# EAGLE board PCR-Voltage-Divider-Storage-Unit-array (EAGLE 7.7.0)
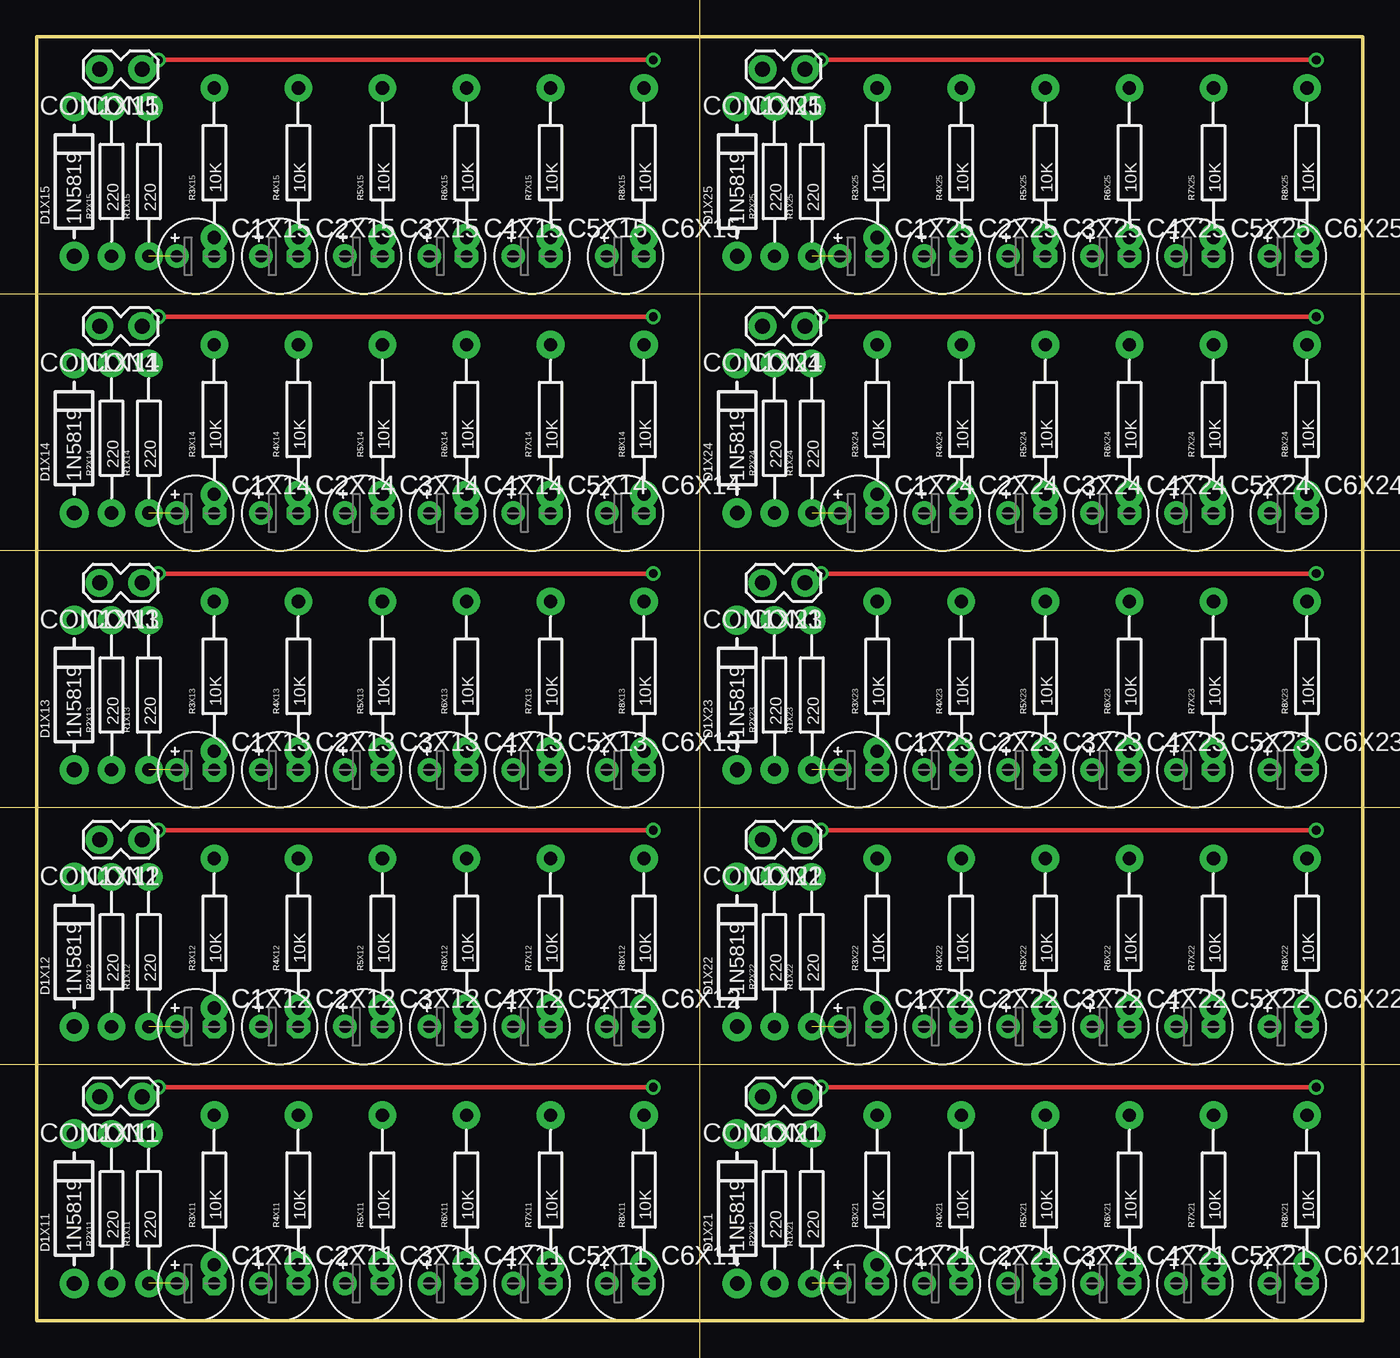
[diagram p0: board, top side]
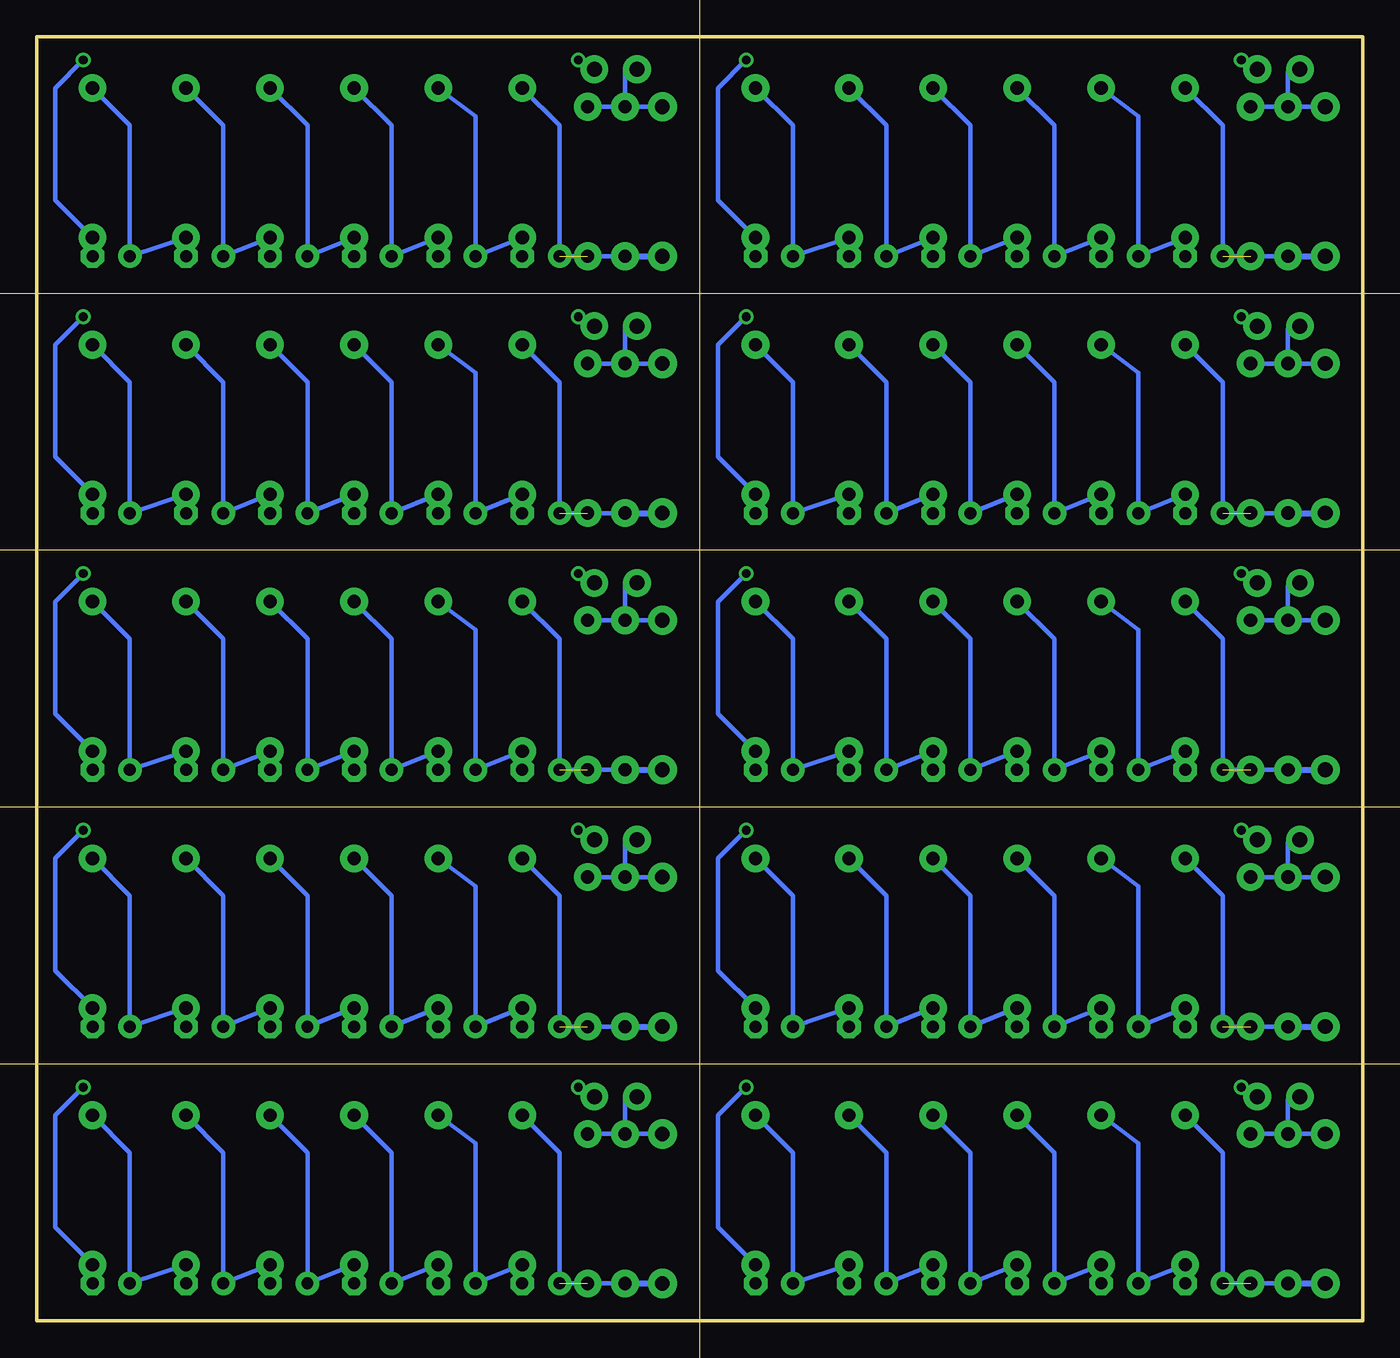
[diagram p1: board, bottom side, seen from below]

Size 90.13 x 87.25 mm. Coordinates in mm from the lower left corner, seen from the top.
Outline: 0,0 90.13,0 90.13,87.25 0,87.25 0,0
Copper layers (1*16): Top 0.035mm / dielectric 1.5mm / Bottom 0.035mm
Design rules "default": minimum track width 10mil, minimum drill 24mil, track to track 8mil, track to pad 8mil, pad to pad 8mil, via to via 8mil, smd to smd 8mil, copper to edge 40mil, drill to drill 8mil, minimum pad ring 10mil, minimum via ring 8mil, stop-mask expansion 4mil, vias tented up to drill 0mil, thermal gap 10mil
Milling: 5 lines

## Footprints (pad centres in the part's own frame; a part is rotated, then mirrored left to right if it is on the bottom)
E2,5-5 = drill 0.813 pad 1.6: + -1.27,0 | drill 0.813 pad 1.6 octagon: - 1.27,0
1X02_LOCK = drill 1.016 pad 1.88: 1 -0.178,0; 2 2.718,0
DIODE-1N4001 = drill 1 pad 1.981: A 5.08,0; C -5.08,0
AXIAL-0.4-RES = drill 0.9 pad 1.88: P$1 -5.08,0; P$2 5.08,0

## Placement (x,y rotation side)
C1X11  .22F  [E2,5-5]  10.79,2.54 0 top
C1X12  .22F  [E2,5-5]  10.79,19.99 0 top
C1X13  .22F  [E2,5-5]  10.79,37.44 0 top
C1X14  .22F  [E2,5-5]  10.79,54.89 0 top
C1X15  .22F  [E2,5-5]  10.79,72.34 0 top
C1X21  .22F  [E2,5-5]  55.86,2.54 0 top
C1X22  .22F  [E2,5-5]  55.86,19.99 0 top
C1X23  .22F  [E2,5-5]  55.86,37.44 0 top
C1X24  .22F  [E2,5-5]  55.86,54.89 0 top
C1X25  .22F  [E2,5-5]  55.86,72.34 0 top
C2X11  .22F  [E2,5-5]  16.51,2.54 0 top
C2X12  .22F  [E2,5-5]  16.51,19.99 0 top
C2X13  .22F  [E2,5-5]  16.51,37.44 0 top
C2X14  .22F  [E2,5-5]  16.51,54.89 0 top
C2X15  .22F  [E2,5-5]  16.51,72.34 0 top
C2X21  .22F  [E2,5-5]  61.58,2.54 0 top
C2X22  .22F  [E2,5-5]  61.58,19.99 0 top
C2X23  .22F  [E2,5-5]  61.58,37.44 0 top
C2X24  .22F  [E2,5-5]  61.58,54.89 0 top
C2X25  .22F  [E2,5-5]  61.58,72.34 0 top
C3X11  .22F  [E2,5-5]  22.23,2.54 0 top
C3X12  .22F  [E2,5-5]  22.23,19.99 0 top
C3X13  .22F  [E2,5-5]  22.23,37.44 0 top
C3X14  .22F  [E2,5-5]  22.23,54.89 0 top
C3X15  .22F  [E2,5-5]  22.23,72.34 0 top
C3X21  .22F  [E2,5-5]  67.29,2.54 0 top
C3X22  .22F  [E2,5-5]  67.29,19.99 0 top
C3X23  .22F  [E2,5-5]  67.29,37.44 0 top
C3X24  .22F  [E2,5-5]  67.29,54.89 0 top
C3X25  .22F  [E2,5-5]  67.29,72.34 0 top
C4X11  .22F  [E2,5-5]  27.94,2.54 0 top
C4X12  .22F  [E2,5-5]  27.94,19.99 0 top
C4X13  .22F  [E2,5-5]  27.94,37.44 0 top
C4X14  .22F  [E2,5-5]  27.94,54.89 0 top
C4X15  .22F  [E2,5-5]  27.94,72.34 0 top
C4X21  .22F  [E2,5-5]  73,2.54 0 top
C4X22  .22F  [E2,5-5]  73,19.99 0 top
C4X23  .22F  [E2,5-5]  73,37.44 0 top
C4X24  .22F  [E2,5-5]  73,54.89 0 top
C4X25  .22F  [E2,5-5]  73,72.34 0 top
C5X11  .22F @ 2.5V  [E2,5-5]  33.66,2.54 0 top
C5X12  .22F @ 2.5V  [E2,5-5]  33.66,19.99 0 top
C5X13  .22F @ 2.5V  [E2,5-5]  33.66,37.44 0 top
C5X14  .22F @ 2.5V  [E2,5-5]  33.66,54.89 0 top
C5X15  .22F @ 2.5V  [E2,5-5]  33.66,72.34 0 top
C5X21  .22F @ 2.5V  [E2,5-5]  78.72,2.54 0 top
C5X22  .22F @ 2.5V  [E2,5-5]  78.72,19.99 0 top
C5X23  .22F @ 2.5V  [E2,5-5]  78.72,37.44 0 top
C5X24  .22F @ 2.5V  [E2,5-5]  78.72,54.89 0 top
C5X25  .22F @ 2.5V  [E2,5-5]  78.72,72.34 0 top
C6X11  .22F  [E2,5-5]  40.01,2.54 0 top
C6X12  .22F  [E2,5-5]  40.01,19.99 0 top
C6X13  .22F  [E2,5-5]  40.01,37.44 0 top
C6X14  .22F  [E2,5-5]  40.01,54.89 0 top
C6X15  .22F  [E2,5-5]  40.01,72.34 0 top
C6X21  .22F  [E2,5-5]  85.07,2.54 0 top
C6X22  .22F  [E2,5-5]  85.07,19.99 0 top
C6X23  .22F  [E2,5-5]  85.07,37.44 0 top
C6X24  .22F  [E2,5-5]  85.07,54.89 0 top
C6X25  .22F  [E2,5-5]  85.07,72.34 0 top
CON1X11  [1X02_LOCK]  6.99,15.24 180 top
CON1X12  [1X02_LOCK]  6.99,32.69 180 top
CON1X13  [1X02_LOCK]  6.99,50.14 180 top
CON1X14  [1X02_LOCK]  6.99,67.59 180 top
CON1X15  [1X02_LOCK]  6.99,85.04 180 top
CON1X21  [1X02_LOCK]  52.05,15.24 180 top
CON1X22  [1X02_LOCK]  52.05,32.69 180 top
CON1X23  [1X02_LOCK]  52.05,50.14 180 top
CON1X24  [1X02_LOCK]  52.05,67.59 180 top
CON1X25  [1X02_LOCK]  52.05,85.04 180 top
D1X11  1N5819  [DIODE-1N4001]  2.54,7.62 270 top
D1X12  1N5819  [DIODE-1N4001]  2.54,25.07 270 top
D1X13  1N5819  [DIODE-1N4001]  2.54,42.52 270 top
D1X14  1N5819  [DIODE-1N4001]  2.54,59.97 270 top
D1X15  1N5819  [DIODE-1N4001]  2.54,77.42 270 top
D1X21  1N5819  [DIODE-1N4001]  47.6,7.62 270 top
D1X22  1N5819  [DIODE-1N4001]  47.6,25.07 270 top
D1X23  1N5819  [DIODE-1N4001]  47.6,42.52 270 top
D1X24  1N5819  [DIODE-1N4001]  47.6,59.97 270 top
D1X25  1N5819  [DIODE-1N4001]  47.6,77.42 270 top
R1X11  220  [AXIAL-0.4-RES]  7.62,7.62 90 top
R1X12  220  [AXIAL-0.4-RES]  7.62,25.07 90 top
R1X13  220  [AXIAL-0.4-RES]  7.62,42.52 90 top
R1X14  220  [AXIAL-0.4-RES]  7.62,59.97 90 top
R1X15  220  [AXIAL-0.4-RES]  7.62,77.42 90 top
R1X21  220  [AXIAL-0.4-RES]  52.69,7.62 90 top
R1X22  220  [AXIAL-0.4-RES]  52.69,25.07 90 top
R1X23  220  [AXIAL-0.4-RES]  52.69,42.52 90 top
R1X24  220  [AXIAL-0.4-RES]  52.69,59.97 90 top
R1X25  220  [AXIAL-0.4-RES]  52.69,77.42 90 top
R2X11  220  [AXIAL-0.4-RES]  5.08,7.62 90 top
R2X12  220  [AXIAL-0.4-RES]  5.08,25.07 90 top
R2X13  220  [AXIAL-0.4-RES]  5.08,42.52 90 top
R2X14  220  [AXIAL-0.4-RES]  5.08,59.97 90 top
R2X15  220  [AXIAL-0.4-RES]  5.08,77.42 90 top
R2X21  220  [AXIAL-0.4-RES]  50.15,7.62 90 top
R2X22  220  [AXIAL-0.4-RES]  50.15,25.07 90 top
R2X23  220  [AXIAL-0.4-RES]  50.15,42.52 90 top
R2X24  220  [AXIAL-0.4-RES]  50.15,59.97 90 top
R2X25  220  [AXIAL-0.4-RES]  50.15,77.42 90 top
R3X11  10K  [AXIAL-0.4-RES]  12.06,8.89 90 top
R3X12  10K  [AXIAL-0.4-RES]  12.06,26.34 90 top
R3X13  10K  [AXIAL-0.4-RES]  12.06,43.79 90 top
R3X14  10K  [AXIAL-0.4-RES]  12.06,61.24 90 top
R3X15  10K  [AXIAL-0.4-RES]  12.06,78.69 90 top
R3X21  10K  [AXIAL-0.4-RES]  57.13,8.89 90 top
R3X22  10K  [AXIAL-0.4-RES]  57.13,26.34 90 top
R3X23  10K  [AXIAL-0.4-RES]  57.13,43.79 90 top
R3X24  10K  [AXIAL-0.4-RES]  57.13,61.24 90 top
R3X25  10K  [AXIAL-0.4-RES]  57.13,78.69 90 top
R4X11  10K  [AXIAL-0.4-RES]  17.78,8.89 90 top
R4X12  10K  [AXIAL-0.4-RES]  17.78,26.34 90 top
R4X13  10K  [AXIAL-0.4-RES]  17.78,43.79 90 top
R4X14  10K  [AXIAL-0.4-RES]  17.78,61.24 90 top
R4X15  10K  [AXIAL-0.4-RES]  17.78,78.69 90 top
R4X21  10K  [AXIAL-0.4-RES]  62.84,8.89 90 top
R4X22  10K  [AXIAL-0.4-RES]  62.84,26.34 90 top
R4X23  10K  [AXIAL-0.4-RES]  62.84,43.79 90 top
R4X24  10K  [AXIAL-0.4-RES]  62.84,61.24 90 top
R4X25  10K  [AXIAL-0.4-RES]  62.84,78.69 90 top
R5X11  10K  [AXIAL-0.4-RES]  23.5,8.89 90 top
R5X12  10K  [AXIAL-0.4-RES]  23.5,26.34 90 top
R5X13  10K  [AXIAL-0.4-RES]  23.5,43.79 90 top
R5X14  10K  [AXIAL-0.4-RES]  23.5,61.24 90 top
R5X15  10K  [AXIAL-0.4-RES]  23.5,78.69 90 top
R5X21  10K  [AXIAL-0.4-RES]  68.56,8.89 90 top
R5X22  10K  [AXIAL-0.4-RES]  68.56,26.34 90 top
R5X23  10K  [AXIAL-0.4-RES]  68.56,43.79 90 top
R5X24  10K  [AXIAL-0.4-RES]  68.56,61.24 90 top
R5X25  10K  [AXIAL-0.4-RES]  68.56,78.69 90 top
R6X11  10K  [AXIAL-0.4-RES]  29.21,8.89 90 top
R6X12  10K  [AXIAL-0.4-RES]  29.21,26.34 90 top
R6X13  10K  [AXIAL-0.4-RES]  29.21,43.79 90 top
R6X14  10K  [AXIAL-0.4-RES]  29.21,61.24 90 top
R6X15  10K  [AXIAL-0.4-RES]  29.21,78.69 90 top
R6X21  10K  [AXIAL-0.4-RES]  74.28,8.89 90 top
R6X22  10K  [AXIAL-0.4-RES]  74.28,26.34 90 top
R6X23  10K  [AXIAL-0.4-RES]  74.28,43.79 90 top
R6X24  10K  [AXIAL-0.4-RES]  74.28,61.24 90 top
R6X25  10K  [AXIAL-0.4-RES]  74.28,78.69 90 top
R7X11  10K  [AXIAL-0.4-RES]  34.92,8.89 90 top
R7X12  10K  [AXIAL-0.4-RES]  34.92,26.34 90 top
R7X13  10K  [AXIAL-0.4-RES]  34.92,43.79 90 top
R7X14  10K  [AXIAL-0.4-RES]  34.92,61.24 90 top
R7X15  10K  [AXIAL-0.4-RES]  34.92,78.69 90 top
R7X21  10K  [AXIAL-0.4-RES]  79.99,8.89 90 top
R7X22  10K  [AXIAL-0.4-RES]  79.99,26.34 90 top
R7X23  10K  [AXIAL-0.4-RES]  79.99,43.79 90 top
R7X24  10K  [AXIAL-0.4-RES]  79.99,61.24 90 top
R7X25  10K  [AXIAL-0.4-RES]  79.99,78.69 90 top
R8X11  10K  [AXIAL-0.4-RES]  41.27,8.89 90 top
R8X12  10K  [AXIAL-0.4-RES]  41.27,26.34 90 top
R8X13  10K  [AXIAL-0.4-RES]  41.27,43.79 90 top
R8X14  10K  [AXIAL-0.4-RES]  41.27,61.24 90 top
R8X15  10K  [AXIAL-0.4-RES]  41.27,78.69 90 top
R8X21  10K  [AXIAL-0.4-RES]  86.34,8.89 90 top
R8X22  10K  [AXIAL-0.4-RES]  86.34,26.34 90 top
R8X23  10K  [AXIAL-0.4-RES]  86.34,43.79 90 top
R8X24  10K  [AXIAL-0.4-RES]  86.34,61.24 90 top
R8X25  10K  [AXIAL-0.4-RES]  86.34,78.69 90 top
U$1X11  [CA-PROP65WARNING]  19.05,7.62 0 top
U$1X12  [CA-PROP65WARNING]  19.05,25.07 0 top
U$1X13  [CA-PROP65WARNING]  19.05,42.52 0 top
U$1X14  [CA-PROP65WARNING]  19.05,59.97 0 top
U$1X15  [CA-PROP65WARNING]  19.05,77.42 0 top
U$1X21  [CA-PROP65WARNING]  64.11,7.62 0 top
U$1X22  [CA-PROP65WARNING]  64.11,25.07 0 top
U$1X23  [CA-PROP65WARNING]  64.11,42.52 0 top
U$1X24  [CA-PROP65WARNING]  64.11,59.97 0 top
U$1X25  [CA-PROP65WARNING]  64.11,77.42 0 top

## Library data of the parts
C1X11-C1X15 C1X21-C1X25 C2X11-C2X15 C2X21-C2X25 C3X11-C3X15 C3X21-C3X25 C4X11-C4X15 C4X21-C4X25 C5X11-C5X15 C5X21-C5X25 C6X11-C6X15 C6X21-C6X25 = rcl
CON1X11-CON1X15 CON1X21-CON1X25 D1X11-D1X15 D1X21-D1X25 R1X11-R1X15 R1X21-R1X25 R2X11-R2X15 R2X21-R2X25 R3X11-R3X15 R3X21-R3X25 R4X11-R4X15 R4X21-R4X25 R5X11-R5X15 R5X21-R5X25 R6X11-R6X15 R6X21-R6X25 R7X11-R7X15 R7X21-R7X25 R8X11-R8X15 R8X21-R8X25 = SPCoast
U$1X11-U$1X15 U$1X21-U$1X25 = MRCS-prop65warningBtm

## Nets
N$1X11: C1X11.- C2X11.+ R3X11.P$1 R4X11.P$2
N$1X12: C1X12.- C2X12.+ R3X12.P$1 R4X12.P$2
N$1X13: C1X13.- C2X13.+ R3X13.P$1 R4X13.P$2
N$1X14: C1X14.- C2X14.+ R3X14.P$1 R4X14.P$2
N$1X15: C1X15.- C2X15.+ R3X15.P$1 R4X15.P$2
N$1X21: C1X21.- C2X21.+ R3X21.P$1 R4X21.P$2
N$1X22: C1X22.- C2X22.+ R3X22.P$1 R4X22.P$2
N$1X23: C1X23.- C2X23.+ R3X23.P$1 R4X23.P$2
N$1X24: C1X24.- C2X24.+ R3X24.P$1 R4X24.P$2
N$1X25: C1X25.- C2X25.+ R3X25.P$1 R4X25.P$2
N$2X11: C2X11.- C3X11.+ R4X11.P$1 R5X11.P$2
N$2X12: C2X12.- C3X12.+ R4X12.P$1 R5X12.P$2
N$2X13: C2X13.- C3X13.+ R4X13.P$1 R5X13.P$2
N$2X14: C2X14.- C3X14.+ R4X14.P$1 R5X14.P$2
N$2X15: C2X15.- C3X15.+ R4X15.P$1 R5X15.P$2
N$2X21: C2X21.- C3X21.+ R4X21.P$1 R5X21.P$2
N$2X22: C2X22.- C3X22.+ R4X22.P$1 R5X22.P$2
N$2X23: C2X23.- C3X23.+ R4X23.P$1 R5X23.P$2
N$2X24: C2X24.- C3X24.+ R4X24.P$1 R5X24.P$2
N$2X25: C2X25.- C3X25.+ R4X25.P$1 R5X25.P$2
N$4X11: C4X11.- C5X11.+ R6X11.P$1 R7X11.P$2
N$4X12: C4X12.- C5X12.+ R6X12.P$1 R7X12.P$2
N$4X13: C4X13.- C5X13.+ R6X13.P$1 R7X13.P$2
N$4X14: C4X14.- C5X14.+ R6X14.P$1 R7X14.P$2
N$4X15: C4X15.- C5X15.+ R6X15.P$1 R7X15.P$2
N$4X21: C4X21.- C5X21.+ R6X21.P$1 R7X21.P$2
N$4X22: C4X22.- C5X22.+ R6X22.P$1 R7X22.P$2
N$4X23: C4X23.- C5X23.+ R6X23.P$1 R7X23.P$2
N$4X24: C4X24.- C5X24.+ R6X24.P$1 R7X24.P$2
N$4X25: C4X25.- C5X25.+ R6X25.P$1 R7X25.P$2
N$5X11: C5X11.- C6X11.+ R7X11.P$1 R8X11.P$2
N$5X12: C5X12.- C6X12.+ R7X12.P$1 R8X12.P$2
N$5X13: C5X13.- C6X13.+ R7X13.P$1 R8X13.P$2
N$5X14: C5X14.- C6X14.+ R7X14.P$1 R8X14.P$2
N$5X15: C5X15.- C6X15.+ R7X15.P$1 R8X15.P$2
N$5X21: C5X21.- C6X21.+ R7X21.P$1 R8X21.P$2
N$5X22: C5X22.- C6X22.+ R7X22.P$1 R8X22.P$2
N$5X23: C5X23.- C6X23.+ R7X23.P$1 R8X23.P$2
N$5X24: C5X24.- C6X24.+ R7X24.P$1 R8X24.P$2
N$5X25: C5X25.- C6X25.+ R7X25.P$1 R8X25.P$2
N$6X11: C1X11.+ D1X11.A R1X11.P$1 R2X11.P$1 R3X11.P$2
N$6X12: C1X12.+ D1X12.A R1X12.P$1 R2X12.P$1 R3X12.P$2
N$6X13: C1X13.+ D1X13.A R1X13.P$1 R2X13.P$1 R3X13.P$2
N$6X14: C1X14.+ D1X14.A R1X14.P$1 R2X14.P$1 R3X14.P$2
N$6X15: C1X15.+ D1X15.A R1X15.P$1 R2X15.P$1 R3X15.P$2
N$6X21: C1X21.+ D1X21.A R1X21.P$1 R2X21.P$1 R3X21.P$2
N$6X22: C1X22.+ D1X22.A R1X22.P$1 R2X22.P$1 R3X22.P$2
N$6X23: C1X23.+ D1X23.A R1X23.P$1 R2X23.P$1 R3X23.P$2
N$6X24: C1X24.+ D1X24.A R1X24.P$1 R2X24.P$1 R3X24.P$2
N$6X25: C1X25.+ D1X25.A R1X25.P$1 R2X25.P$1 R3X25.P$2
N$9X11: C3X11.- C4X11.+ R5X11.P$1 R6X11.P$2
N$9X12: C3X12.- C4X12.+ R5X12.P$1 R6X12.P$2
N$9X13: C3X13.- C4X13.+ R5X13.P$1 R6X13.P$2
N$9X14: C3X14.- C4X14.+ R5X14.P$1 R6X14.P$2
N$9X15: C3X15.- C4X15.+ R5X15.P$1 R6X15.P$2
N$9X21: C3X21.- C4X21.+ R5X21.P$1 R6X21.P$2
N$9X22: C3X22.- C4X22.+ R5X22.P$1 R6X22.P$2
N$9X23: C3X23.- C4X23.+ R5X23.P$1 R6X23.P$2
N$9X24: C3X24.- C4X24.+ R5X24.P$1 R6X24.P$2
N$9X25: C3X25.- C4X25.+ R5X25.P$1 R6X25.P$2
NEGX11: C6X11.- CON1X11.1 R8X11.P$1
NEGX12: C6X12.- CON1X12.1 R8X12.P$1
NEGX13: C6X13.- CON1X13.1 R8X13.P$1
NEGX14: C6X14.- CON1X14.1 R8X14.P$1
NEGX15: C6X15.- CON1X15.1 R8X15.P$1
NEGX21: C6X21.- CON1X21.1 R8X21.P$1
NEGX22: C6X22.- CON1X22.1 R8X22.P$1
NEGX23: C6X23.- CON1X23.1 R8X23.P$1
NEGX24: C6X24.- CON1X24.1 R8X24.P$1
NEGX25: C6X25.- CON1X25.1 R8X25.P$1
POSX11: CON1X11.2 D1X11.C R1X11.P$2 R2X11.P$2
POSX12: CON1X12.2 D1X12.C R1X12.P$2 R2X12.P$2
POSX13: CON1X13.2 D1X13.C R1X13.P$2 R2X13.P$2
POSX14: CON1X14.2 D1X14.C R1X14.P$2 R2X14.P$2
POSX15: CON1X15.2 D1X15.C R1X15.P$2 R2X15.P$2
POSX21: CON1X21.2 D1X21.C R1X21.P$2 R2X21.P$2
POSX22: CON1X22.2 D1X22.C R1X22.P$2 R2X22.P$2
POSX23: CON1X23.2 D1X23.C R1X23.P$2 R2X23.P$2
POSX24: CON1X24.2 D1X24.C R1X24.P$2 R2X24.P$2
POSX25: CON1X25.2 D1X25.C R1X25.P$2 R2X25.P$2

## Tracks (layer width: path | path; a pad name or v marks a point on that pad's centre or on a via)
N$1X11
  Bottom 0.305: C1X11.- R3X11.P$1 C2X11.+ 15.24,12.06 R4X11.P$2
N$1X12
  Bottom 0.305: C1X12.- R3X12.P$1 C2X12.+ 15.24,29.52 R4X12.P$2
N$1X13
  Bottom 0.305: C1X13.- R3X13.P$1 C2X13.+ 15.24,46.97 R4X13.P$2
N$1X14
  Bottom 0.305: C1X14.- R3X14.P$1 C2X14.+ 15.24,64.42 R4X14.P$2
N$1X15
  Bottom 0.305: C1X15.- R3X15.P$1 C2X15.+ 15.24,81.86 R4X15.P$2
N$1X21
  Bottom 0.305: C1X21.- R3X21.P$1 C2X21.+ 60.3,12.06 R4X21.P$2
N$1X22
  Bottom 0.305: C1X22.- R3X22.P$1 C2X22.+ 60.3,29.52 R4X22.P$2
N$1X23
  Bottom 0.305: C1X23.- R3X23.P$1 C2X23.+ 60.3,46.97 R4X23.P$2
N$1X24
  Bottom 0.305: C1X24.- R3X24.P$1 C2X24.+ 60.3,64.42 R4X24.P$2
N$1X25
  Bottom 0.305: C1X25.- R3X25.P$1 C2X25.+ 60.3,81.86 R4X25.P$2
N$2X11
  Bottom 0.305: C2X11.- R4X11.P$1 C3X11.+ 20.95,11.43 R5X11.P$2
N$2X12
  Bottom 0.305: C2X12.- R4X12.P$1 C3X12.+ 20.95,28.88 R5X12.P$2
N$2X13
  Bottom 0.305: C2X13.- R4X13.P$1 C3X13.+ 20.95,46.33 R5X13.P$2
N$2X14
  Bottom 0.305: C2X14.- R4X14.P$1 C3X14.+ 20.95,63.78 R5X14.P$2
N$2X15
  Bottom 0.305: C2X15.- R4X15.P$1 C3X15.+ 20.95,81.23 R5X15.P$2
N$2X21
  Bottom 0.305: C2X21.- R4X21.P$1 C3X21.+ 66.02,11.43 R5X21.P$2
N$2X22
  Bottom 0.305: C2X22.- R4X22.P$1 C3X22.+ 66.02,28.88 R5X22.P$2
N$2X23
  Bottom 0.305: C2X23.- R4X23.P$1 C3X23.+ 66.02,46.33 R5X23.P$2
N$2X24
  Bottom 0.305: C2X24.- R4X24.P$1 C3X24.+ 66.02,63.78 R5X24.P$2
N$2X25
  Bottom 0.305: C2X25.- R4X25.P$1 C3X25.+ 66.02,81.23 R5X25.P$2
N$4X11
  Bottom 0.305: C4X11.- R6X11.P$1 C5X11.+ 32.38,11.43 R7X11.P$2
N$4X12
  Bottom 0.305: C4X12.- R6X12.P$1 C5X12.+ 32.38,28.88 R7X12.P$2
N$4X13
  Bottom 0.305: C4X13.- R6X13.P$1 C5X13.+ 32.38,46.33 R7X13.P$2
N$4X14
  Bottom 0.305: C4X14.- R6X14.P$1 C5X14.+ 32.38,63.78 R7X14.P$2
N$4X15
  Bottom 0.305: C4X15.- R6X15.P$1 C5X15.+ 32.38,81.23 R7X15.P$2
N$4X21
  Bottom 0.305: C4X21.- R6X21.P$1 C5X21.+ 77.45,11.43 R7X21.P$2
N$4X22
  Bottom 0.305: C4X22.- R6X22.P$1 C5X22.+ 77.45,28.88 R7X22.P$2
N$4X23
  Bottom 0.305: C4X23.- R6X23.P$1 C5X23.+ 77.45,46.33 R7X23.P$2
N$4X24
  Bottom 0.305: C4X24.- R6X24.P$1 C5X24.+ 77.45,63.78 R7X24.P$2
N$4X25
  Bottom 0.305: C4X25.- R6X25.P$1 C5X25.+ 77.45,81.23 R7X25.P$2
N$5X11
  Bottom 0.305: C5X11.- R7X11.P$1 C6X11.+ 38.73,11.43 R8X11.P$2
N$5X12
  Bottom 0.305: C5X12.- R7X12.P$1 C6X12.+ 38.73,28.88 R8X12.P$2
N$5X13
  Bottom 0.305: C5X13.- R7X13.P$1 C6X13.+ 38.73,46.33 R8X13.P$2
N$5X14
  Bottom 0.305: C5X14.- R7X14.P$1 C6X14.+ 38.73,63.78 R8X14.P$2
N$5X15
  Bottom 0.305: C5X15.- R7X15.P$1 C6X15.+ 38.73,81.23 R8X15.P$2
N$5X21
  Bottom 0.305: C5X21.- R7X21.P$1 C6X21.+ 83.8,11.43 R8X21.P$2
N$5X22
  Bottom 0.305: C5X22.- R7X22.P$1 C6X22.+ 83.8,28.88 R8X22.P$2
N$5X23
  Bottom 0.305: C5X23.- R7X23.P$1 C6X23.+ 83.8,46.33 R8X23.P$2
N$5X24
  Bottom 0.305: C5X24.- R7X24.P$1 C6X24.+ 83.8,63.78 R8X24.P$2
N$5X25
  Bottom 0.305: C5X25.- R7X25.P$1 C6X25.+ 83.8,81.23 R8X25.P$2
N$6X11  (1 unrouted)
  Bottom 0.305: R2X11.P$1 C1X11.+ 9.53,11.43 R3X11.P$2
  Bottom 0.406: R2X11.P$1 D1X11.A
N$6X12  (1 unrouted)
  Bottom 0.305: R2X12.P$1 C1X12.+ 9.53,28.88 R3X12.P$2
  Bottom 0.406: R2X12.P$1 D1X12.A
N$6X13  (1 unrouted)
  Bottom 0.305: R2X13.P$1 C1X13.+ 9.53,46.33 R3X13.P$2
  Bottom 0.406: R2X13.P$1 D1X13.A
N$6X14  (1 unrouted)
  Bottom 0.305: R2X14.P$1 C1X14.+ 9.53,63.78 R3X14.P$2
  Bottom 0.406: R2X14.P$1 D1X14.A
N$6X15  (1 unrouted)
  Bottom 0.305: R2X15.P$1 C1X15.+ 9.53,81.23 R3X15.P$2
  Bottom 0.406: R2X15.P$1 D1X15.A
N$6X21  (1 unrouted)
  Bottom 0.305: R2X21.P$1 C1X21.+ 54.59,11.43 R3X21.P$2
  Bottom 0.406: R2X21.P$1 D1X21.A
N$6X22  (1 unrouted)
  Bottom 0.305: R2X22.P$1 C1X22.+ 54.59,28.88 R3X22.P$2
  Bottom 0.406: R2X22.P$1 D1X22.A
N$6X23  (1 unrouted)
  Bottom 0.305: R2X23.P$1 C1X23.+ 54.59,46.33 R3X23.P$2
  Bottom 0.406: R2X23.P$1 D1X23.A
N$6X24  (1 unrouted)
  Bottom 0.305: R2X24.P$1 C1X24.+ 54.59,63.78 R3X24.P$2
  Bottom 0.406: R2X24.P$1 D1X24.A
N$6X25  (1 unrouted)
  Bottom 0.305: R2X25.P$1 C1X25.+ 54.59,81.23 R3X25.P$2
  Bottom 0.406: R2X25.P$1 D1X25.A
N$9X11
  Bottom 0.305: C3X11.- R5X11.P$1 C4X11.+ 26.67,11.43 R6X11.P$2
N$9X12
  Bottom 0.305: C3X12.- R5X12.P$1 C4X12.+ 26.67,28.88 R6X12.P$2
N$9X13
  Bottom 0.305: C3X13.- R5X13.P$1 C4X13.+ 26.67,46.33 R6X13.P$2
N$9X14
  Bottom 0.305: C3X14.- R5X14.P$1 C4X14.+ 26.67,63.78 R6X14.P$2
N$9X15
  Bottom 0.305: C3X15.- R5X15.P$1 C4X15.+ 26.67,81.23 R6X15.P$2
N$9X21
  Bottom 0.305: C3X21.- R5X21.P$1 C4X21.+ 71.73,11.43 R6X21.P$2
N$9X22
  Bottom 0.305: C3X22.- R5X22.P$1 C4X22.+ 71.73,28.88 R6X22.P$2
N$9X23
  Bottom 0.305: C3X23.- R5X23.P$1 C4X23.+ 71.73,46.33 R6X23.P$2
N$9X24
  Bottom 0.305: C3X24.- R5X24.P$1 C4X24.+ 71.73,63.78 R6X24.P$2
N$9X25
  Bottom 0.305: C3X25.- R5X25.P$1 C4X25.+ 71.73,81.23 R6X25.P$2
NEGX11  (via drill 0.6 pad 1.01)
  Top 0.305: v8.26,15.88 v41.91,15.88
  Bottom 0.305: C6X11.- R8X11.P$1 43.81,6.35 43.81,13.97 v41.91,15.88 | CON1X11.1 7.62,15.24 v8.26,15.88
NEGX12  (via drill 0.6 pad 1.01)
  Top 0.305: v8.26,33.33 v41.91,33.33
  Bottom 0.305: C6X12.- R8X12.P$1 43.81,23.8 43.81,31.42 v41.91,33.33 | CON1X12.1 7.62,32.69 v8.26,33.33
NEGX13  (via drill 0.6 pad 1.01)
  Top 0.305: v8.26,50.77 v41.91,50.77
  Bottom 0.305: C6X13.- R8X13.P$1 43.81,41.25 43.81,48.87 v41.91,50.77 | CON1X13.1 7.62,50.14 v8.26,50.77
NEGX14  (via drill 0.6 pad 1.01)
  Top 0.305: v8.26,68.22 v41.91,68.22
  Bottom 0.305: C6X14.- R8X14.P$1 43.81,58.7 43.81,66.32 v41.91,68.22 | CON1X14.1 7.62,67.59 v8.26,68.22
NEGX15  (via drill 0.6 pad 1.01)
  Top 0.305: v8.26,85.67 v41.91,85.67
  Bottom 0.305: C6X15.- R8X15.P$1 43.81,76.15 43.81,83.77 v41.91,85.67 | CON1X15.1 7.62,85.04 v8.26,85.67
NEGX21  (via drill 0.6 pad 1.01)
  Top 0.305: v53.32,15.88 v86.97,15.88
  Bottom 0.305: C6X21.- R8X21.P$1 88.88,6.35 88.88,13.97 v86.97,15.88 | CON1X21.1 52.69,15.24 v53.32,15.88
NEGX22  (via drill 0.6 pad 1.01)
  Top 0.305: v53.32,33.33 v86.97,33.33
  Bottom 0.305: C6X22.- R8X22.P$1 88.88,23.8 88.88,31.42 v86.97,33.33 | CON1X22.1 52.69,32.69 v53.32,33.33
NEGX23  (via drill 0.6 pad 1.01)
  Top 0.305: v53.32,50.77 v86.97,50.77
  Bottom 0.305: C6X23.- R8X23.P$1 88.88,41.25 88.88,48.87 v86.97,50.77 | CON1X23.1 52.69,50.14 v53.32,50.77
NEGX24  (via drill 0.6 pad 1.01)
  Top 0.305: v53.32,68.22 v86.97,68.22
  Bottom 0.305: C6X24.- R8X24.P$1 88.88,58.7 88.88,66.32 v86.97,68.22 | CON1X24.1 52.69,67.59 v53.32,68.22
NEGX25  (via drill 0.6 pad 1.01)
  Top 0.305: v53.32,85.67 v86.97,85.67
  Bottom 0.305: C6X25.- R8X25.P$1 88.88,76.15 88.88,83.77 v86.97,85.67 | CON1X25.1 52.69,85.04 v53.32,85.67
POSX11
  Bottom 0.305: D1X11.C R2X11.P$2 | R2X11.P$2 R1X11.P$2 | R2X11.P$2 5.08,15.06 CON1X11.2
POSX12
  Bottom 0.305: D1X12.C R2X12.P$2 | R2X12.P$2 R1X12.P$2 | R2X12.P$2 5.08,32.51 CON1X12.2
POSX13
  Bottom 0.305: D1X13.C R2X13.P$2 | R2X13.P$2 R1X13.P$2 | R2X13.P$2 5.08,49.96 CON1X13.2
POSX14
  Bottom 0.305: D1X14.C R2X14.P$2 | R2X14.P$2 R1X14.P$2 | R2X14.P$2 5.08,67.41 CON1X14.2
POSX15
  Bottom 0.305: D1X15.C R2X15.P$2 | R2X15.P$2 R1X15.P$2 | R2X15.P$2 5.08,84.86 CON1X15.2
POSX21
  Bottom 0.305: D1X21.C R2X21.P$2 | R2X21.P$2 R1X21.P$2 | R2X21.P$2 50.15,15.06 CON1X21.2
POSX22
  Bottom 0.305: D1X22.C R2X22.P$2 | R2X22.P$2 R1X22.P$2 | R2X22.P$2 50.15,32.51 CON1X22.2
POSX23
  Bottom 0.305: D1X23.C R2X23.P$2 | R2X23.P$2 R1X23.P$2 | R2X23.P$2 50.15,49.96 CON1X23.2
POSX24
  Bottom 0.305: D1X24.C R2X24.P$2 | R2X24.P$2 R1X24.P$2 | R2X24.P$2 50.15,67.41 CON1X24.2
POSX25
  Bottom 0.305: D1X25.C R2X25.P$2 | R2X25.P$2 R1X25.P$2 | R2X25.P$2 50.15,84.86 CON1X25.2

## Text on the board
Route14: CON1 | CON1 | R3 | R4 | R5 | R6 | R7 | R8 | R3 | R4 | R5 | R6 | R7 | R8 | R2 | R1 | R2 | R1 | D1 | C1 | C2 | C3 | C4 | C5 | C6 | D1 | C1 | C2 | C3 | C4 | C5 | C6 | CON1 | CON1 | R3 | R4 | R5 | R6 | R7 | R8 | R3 | R4 | R5 | R6 | R7 | R8 | D1 | R2 | R1 | D1 | R2 | R1 | C1 | C2 | C3 | C4 | C5 | C6 | C1 | C2 | C3 | C4 | C5 | C6 | CON1 | CON1 | R3 | R4 | R5 | R6 | R7 | R8 | R3 | R4 | R5 | R6 | R7 | R8 | D1 | R2 | R1 | D1 | R2 | R1 | C1 | C2 | C3 | C4 | C5 | C6 | C1 | C2 | C3 | C4 | C5 | C6 | CON1 | CON1 | R3 | R4 | R5 | R6 | R7 | R8 | R3 | R4 | R5 | R6 | R7 | R8 | R2 | R1 | R2 | R1 | D1 | D1 | C1 | C2 | C3 | C4 | C5 | C6 | C1 | C2 | C3 | C4 | C5 | C6 | CON1 | CON1 | R3 | R4 | R5 | R6 | R7 | R8 | R3 | R4 | R5 | R6 | R7 | R8 | D1 | R2 | R1 | D1 | R2 | R1 | C1 | C2 | C3 | C4 | C5 | C6 | C1 | C2 | C3 | C4 | C5 | C6
Milling: V-Score | V-Score | V-Score | V-Score | V-Score
tDocu: - + | - + | - + | - + | - + | - + | - + | - + | - + | - +
bDocu: - + | - + | VDSU / Seth Neumann / 20200929 | VDSU / Seth Neumann / 20200929 | - + | - + | VDSU / Seth Neumann / 20200929 | VDSU / Seth Neumann / 20200929 | - + | - + | VDSU / Seth Neumann / 20200929 | VDSU / Seth Neumann / 20200929 | - + | - + | VDSU / Seth Neumann / 20200929 | VDSU / Seth Neumann / 20200929 | - + | - + | VDSU / Seth Neumann / 20200929 | VDSU / Seth Neumann / 20200929
_tNames: CON1 | CON1 | R3 | R4 | R5 | R6 | R7 | R8 | R3 | R4 | R5 | R6 | R7 | R8 | R2 | R1 | R2 | R1 | D1 | C1 | C2 | C3 | C4 | C5 | C6 | D1 | C1 | C2 | C3 | C4 | C5 | C6 | CON1 | CON1 | R3 | R4 | R5 | R6 | R7 | R8 | R3 | R4 | R5 | R6 | R7 | R8 | D1 | R2 | R1 | D1 | R2 | R1 | C1 | C2 | C3 | C4 | C5 | C6 | C1 | C2 | C3 | C4 | C5 | C6 | CON1 | CON1 | R3 | R4 | R5 | R6 | R7 | R8 | R3 | R4 | R5 | R6 | R7 | R8 | D1 | R2 | R1 | D1 | R2 | R1 | C1 | C2 | C3 | C4 | C5 | C6 | C1 | C2 | C3 | C4 | C5 | C6 | CON1 | CON1 | R3 | R4 | R5 | R6 | R7 | R8 | R3 | R4 | R5 | R6 | R7 | R8 | R2 | R1 | R2 | R1 | D1 | D1 | C1 | C2 | C3 | C4 | C5 | C6 | C1 | C2 | C3 | C4 | C5 | C6 | CON1 | CON1 | R3 | R4 | R5 | R6 | R7 | R8 | R3 | R4 | R5 | R6 | R7 | R8 | D1 | R2 | R1 | D1 | R2 | R1 | C1 | C2 | C3 | C4 | C5 | C6 | C1 | C2 | C3 | C4 | C5 | C6